# Altium PCB PCB_unpour.PcbDoc
Units mil, origin at the board's own origin, x right, y up, seen from the top; angles counter-clockwise.
Board outline 4325 x 4725 mil, 2 copper layers (Top Layer, Bottom Layer); 101 components, 75 nets, 262 pads, 25 vias.
Unrouted connection lines stored in the file: 28.
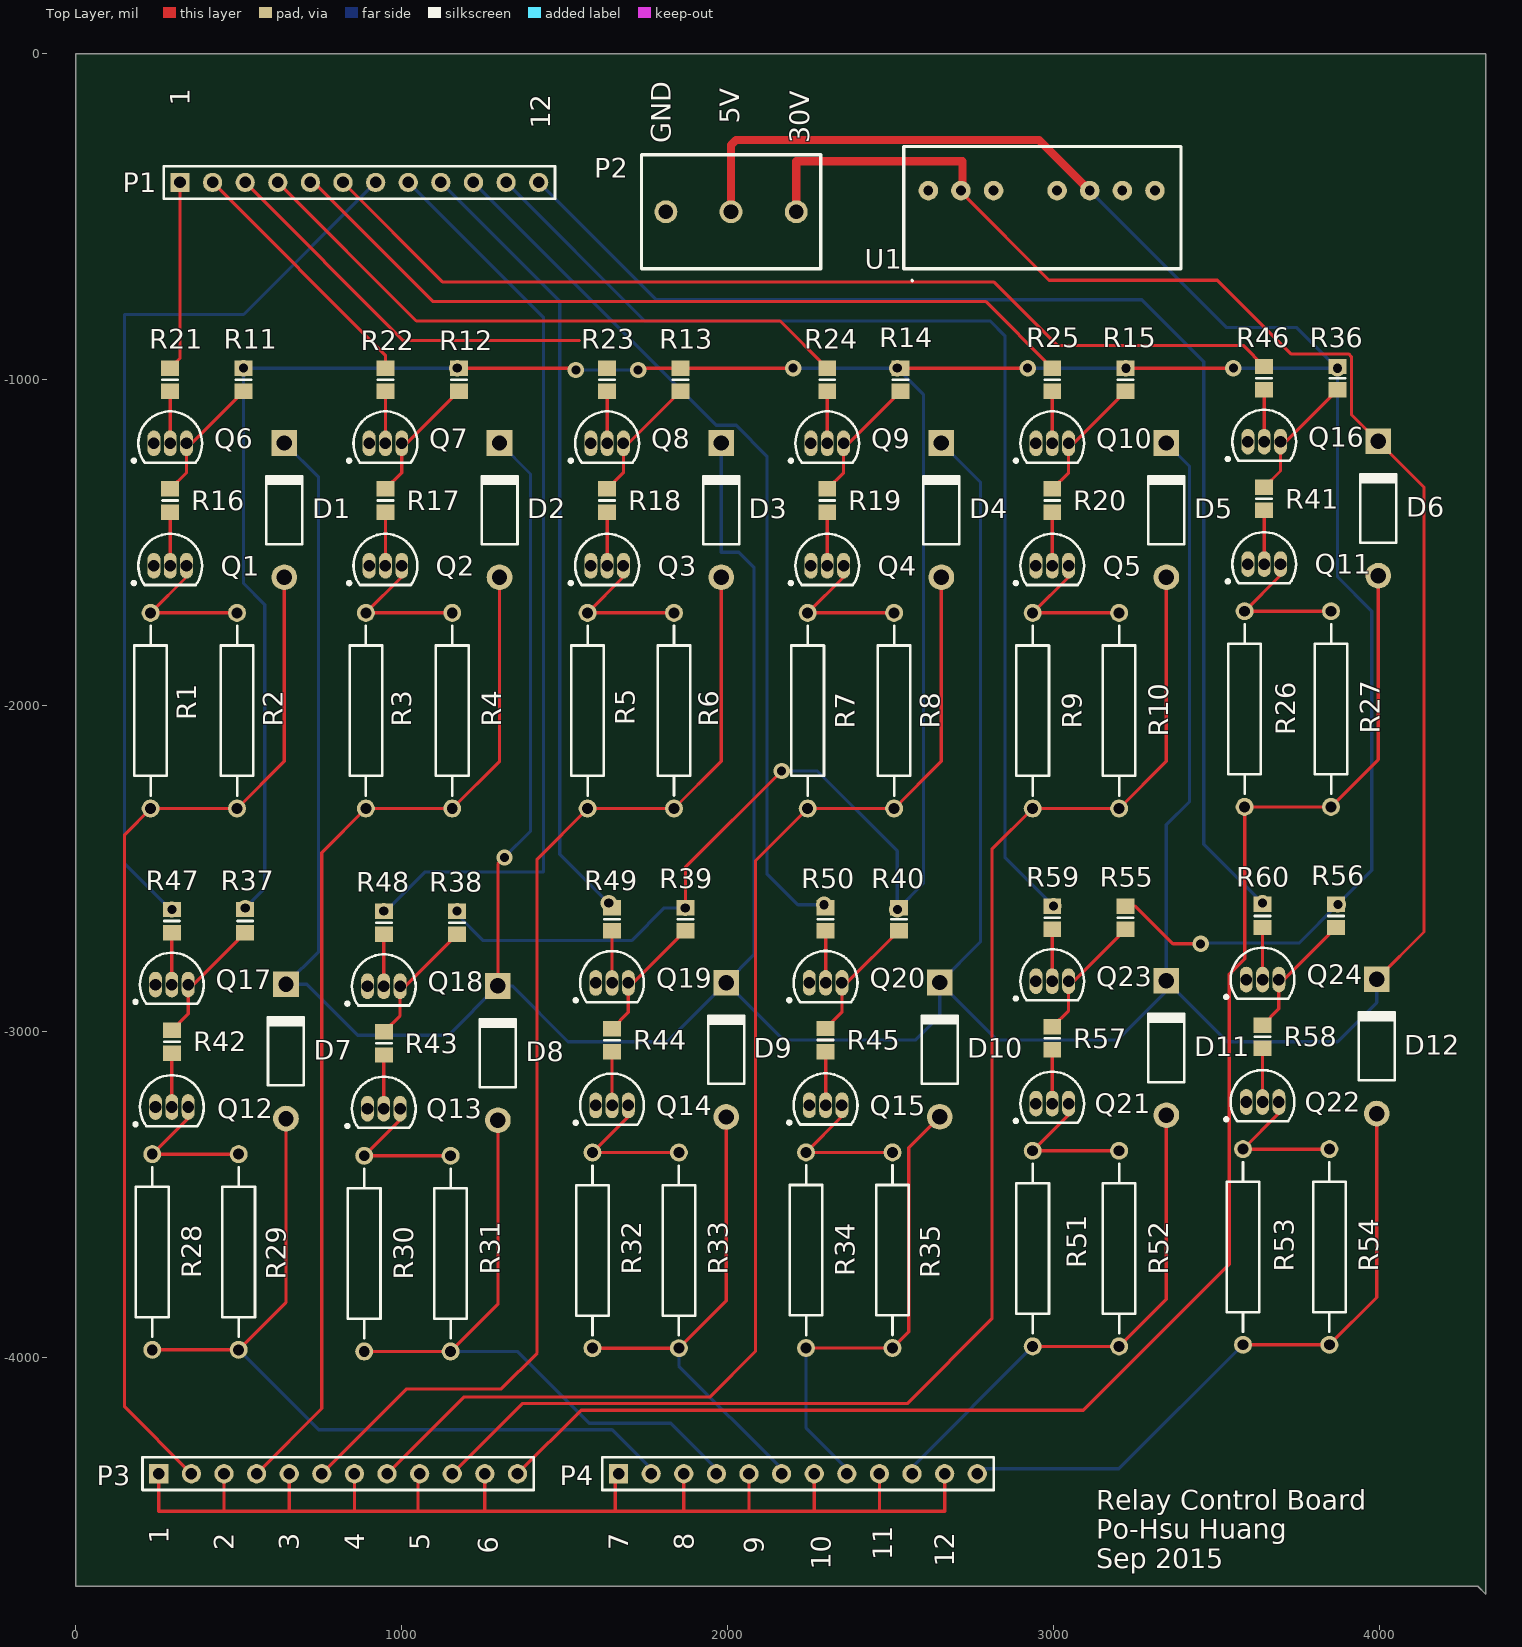
[diagram p0: Top Layer view]
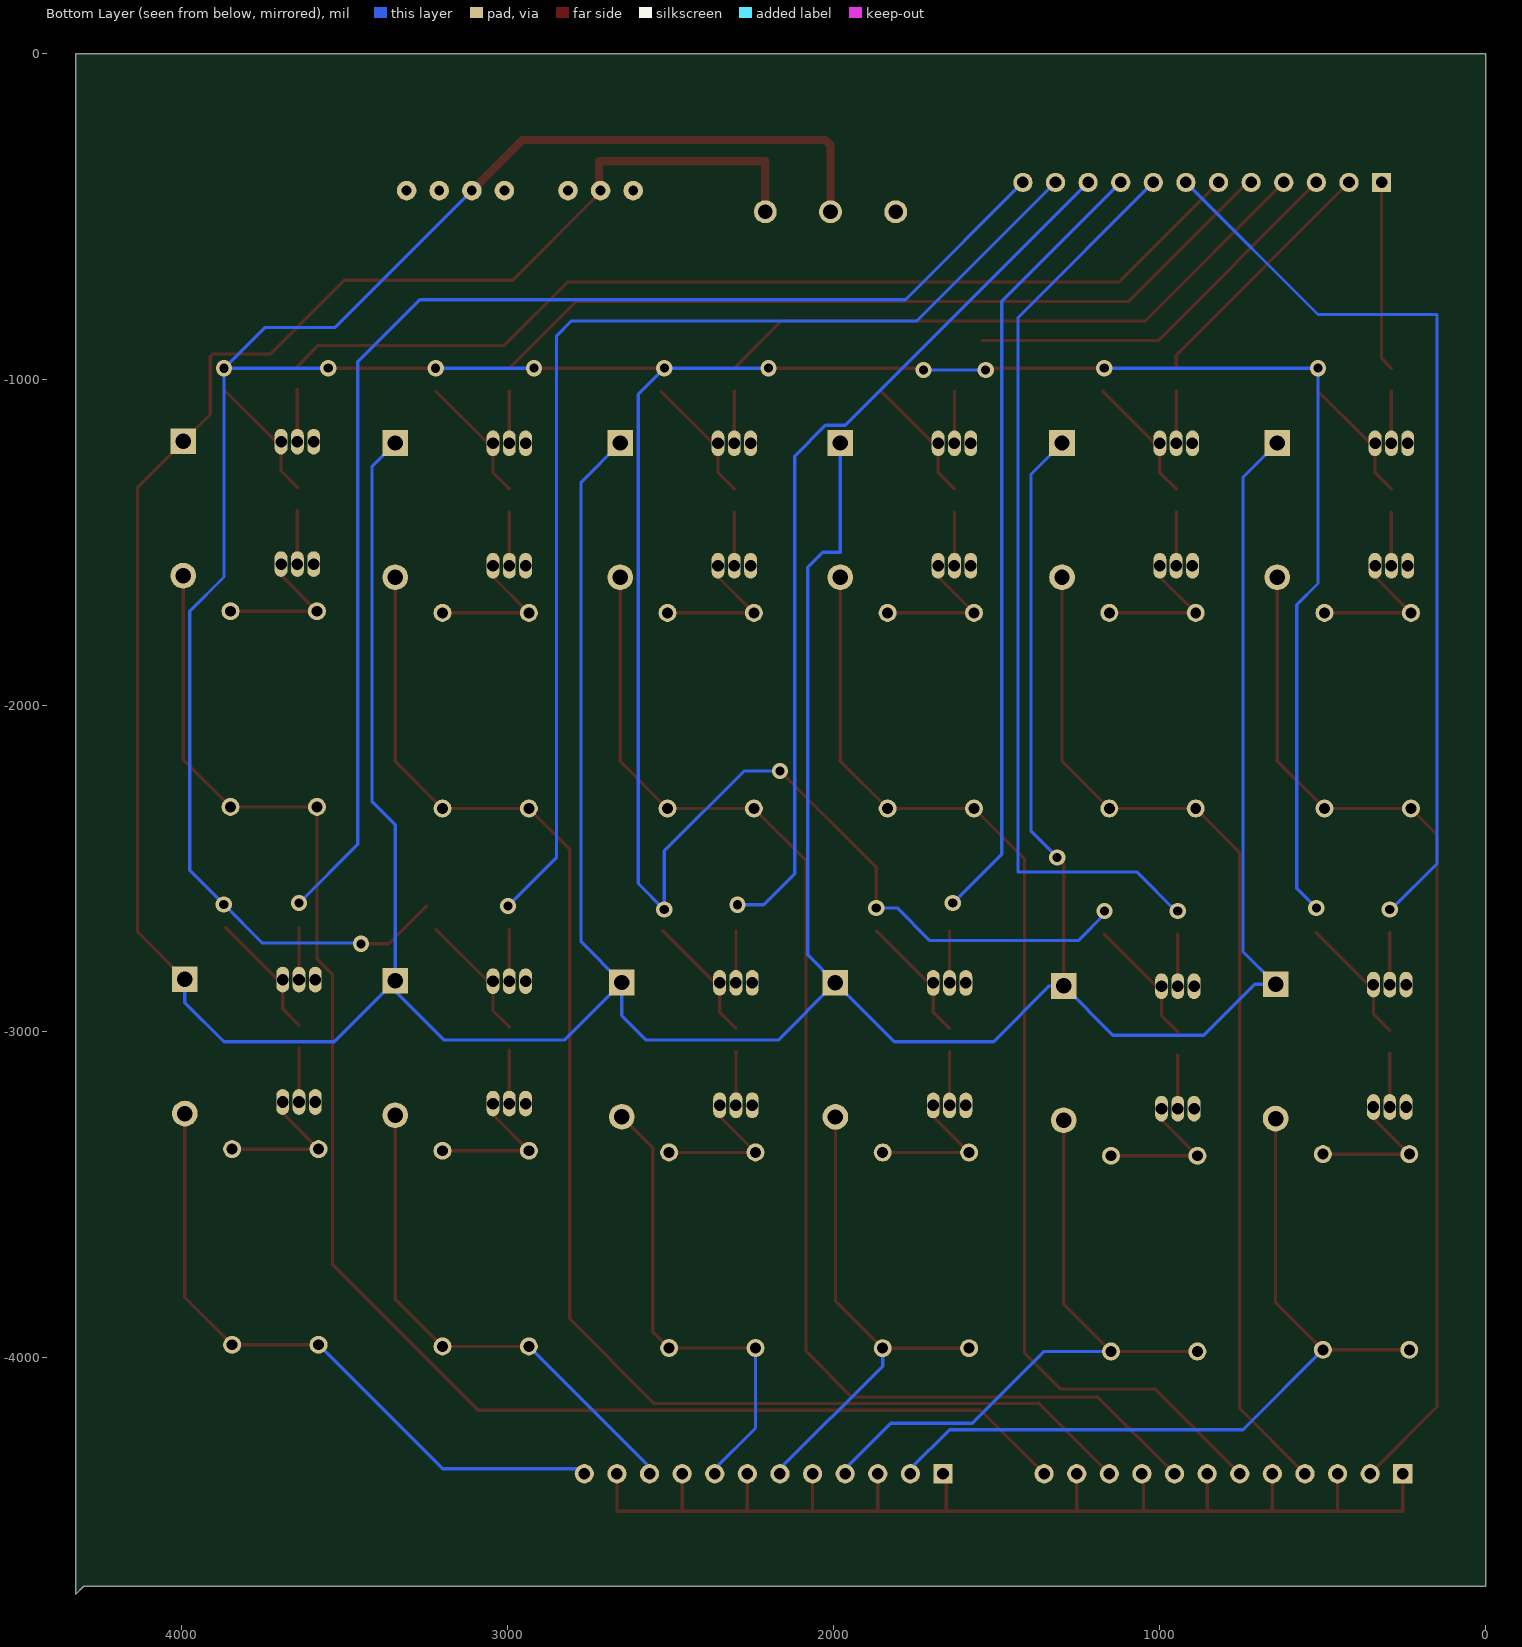
[diagram p1: Bottom Layer view, seen from below]

## Layer stack, top to bottom
Top Solder: solder mask 0.4, Solder Resist, Dk 3.5
Top Layer: signal copper 1.4
Dielectric 1: dielectric 12.6, FR-4, Dk 4.8
Bottom Layer: signal copper 1.4
Bottom Solder: solder mask 0.4, Solder Resist, Dk 3.5

## Board outline
0,0 0,-4700 4300,-4700 4325,-4725 4325,0

## Design rules (kind name [scope] priority, off if disabled: settings)
Clearance [All] p1: gap=10
PolygonConnect [All] p1: connectstyle=Relief reliefconductorwidth=10 reliefentries=4 polygonreliefangle="90 Angle" airgapwidth=10
RoutingVias [All] p1: holewidth=28 width=50 viastyle="Through Hole" minholewidth=28 minwidth=50 maxholewidth=28 maxwidth=50
SolderMaskExpansion [All] p1: expansion=4
Width [All] p1: maxlimit=100 minlimit=10 preferedwidth=10 minimp=50.000000 maximp=50.000000 favimp=50.000000
30 further rules are at their usual default settings.

## Components (designator, comment, footprint, x,y, rotation, side; value= is the part's Value field where it differs from the comment)
D1 "Diode SB140" DO-41 640,-1400 r90 top
D2 "Diode SB140" DO-41 1300,-1400 r90 top
D3 "Diode SB140" DO-41 1980,-1400 r90 top
D4 "Diode SB140" DO-41 2655,-1400 r90 top
D5 "Diode SB140" DO-41 3345,-1400 r90 top
D6 "Diode SB140" DO-41 3995,-1395 r90 top
D7 "Diode SB140" DO-41 645,-3060 r90 top
D8 "Diode SB140" DO-41 1295,-3065 r90 top
D9 "Diode SB140" DO-41 1995,-3055 r90 top
D10 "Diode SB140" DO-41 2650,-3054.57 r90 top
D11 "Diode SB140" DO-41 3345,-3049.57 r90 top
D12 "Diode SB140" DO-41 3990,-3044.57 r90 top
P1 "Header 12" HDR1X12 320,-395 r0 top
P2 "Header 20mils" Header_20mils 2210,-485 r180 top
P3 "Header 12" HDR1X12 255,-4355 r0 top
P4 "Header 12" HDR1X12 1665,-4355 r0 top
Q1 "2N3904" TO-92A 290,-1570.43 r270 top
Q2 "2N3904" TO-92A 950,-1570.43 r270 top
Q3 "2N3904" TO-92A 1630,-1570.43 r270 top
Q4 "2N3904" TO-92A 2305,-1570.43 r270 top
Q5 "2N3904" TO-92A 2995,-1570.43 r270 top
Q6 "2N3904" TO-92A 290,-1195 r270 top
Q7 "2N3904" TO-92A 950,-1195 r270 top
Q8 "2N3904" TO-92A 1630,-1195 r270 top
Q9 "2N3904" TO-92A 2305,-1195 r270 top
Q10 "2N3904" TO-92A 2995,-1195 r270 top
Q11 "2N3904" TO-92A 3645,-1565.43 r270 top
Q12 "2N3904" TO-92A 295,-3230.43 r270 top
Q13 "2N3904" TO-92A 945,-3235.43 r270 top
Q14 "2N3904" TO-92A 1645,-3225.43 r270 top
Q15 "2N3904" TO-92A 2300,-3225 r270 top
Q16 "2N3904" TO-92A 3645,-1190 r270 top
Q17 "2N3904" TO-92A 295,-2855 r270 top
Q18 "2N3904" TO-92A 945,-2860 r270 top
Q19 "2N3904" TO-92A 1645,-2850 r270 top
Q20 "2N3904" TO-92A 2300,-2849.57 r270 top
Q21 "2N3904" TO-92A 2995,-3220 r270 top
Q22 "2N3904" TO-92A 3640,-3215 r270 top
Q23 "2N3904" TO-92A 2995,-2844.57 r270 top
Q24 "2N3904" TO-92A 3640,-2839.57 r270 top
R1 "Res1" AXIAL-0.6 230,-2015 r270 top
R2 "Res1" AXIAL-0.6 495,-2015 r270 top
R3 "Res1" AXIAL-0.6 890,-2015 r270 top
R4 "Res1" AXIAL-0.6 1155,-2015 r270 top
R5 "Res1" AXIAL-0.6 1570,-2015 r270 top
R6 "Res1" AXIAL-0.6 1835,-2015 r270 top
R7 "Res1" AXIAL-0.6 2245,-2015 r270 top
R8 "Res1" AXIAL-0.6 2510,-2015 r270 top
R9 "Res1" AXIAL-0.6 2935,-2015 r270 top
R10 "Res1" AXIAL-0.6 3200,-2015 r270 top
R11 "Res1" 6-0805_N 515,-1000 r90 top
R12 "Res1" 6-0805_N 1175,-1000 r90 top
R13 "Res1" 6-0805_N 1855,-1000 r90 top
R14 "Res1" 6-0805_N 2530,-1000 r90 top
R15 "Res1" 6-0805_N 3220,-1000 r90 top
R16 "Res1" 6-0805_N 290,-1370.43 r90 top
R17 "Res1" 6-0805_N 950,-1370.43 r90 top
R18 "Res1" 6-0805_N 1630,-1370.43 r90 top
R19 "Res1" 6-0805_N 2305,-1370.43 r90 top
R20 "Res1" 6-0805_N 2995,-1370.43 r90 top
R21 "Res1" 6-0805_N 290,-1000 r90 top
R22 "Res1" 6-0805_N 950,-1000 r90 top
R23 "Res1" 6-0805_N 1630,-1000 r90 top
R24 "Res1" 6-0805_N 2305,-1000 r90 top
R25 "Res1" 6-0805_N 2995,-1000 r90 top
R26 "Res1" AXIAL-0.6 3585,-2010 r270 top
R27 "Res1" AXIAL-0.6 3850,-2010 r270 top
R28 "Res1" AXIAL-0.6 235,-3675 r270 top
R29 "Res1" AXIAL-0.6 500,-3675 r270 top
R30 "Res1" AXIAL-0.6 885,-3680 r270 top
R31 "Res1" AXIAL-0.6 1150,-3680 r270 top
R32 "Res1" AXIAL-0.6 1585,-3670 r270 top
R33 "Res1" AXIAL-0.6 1850,-3670 r270 top
R34 "Res1" AXIAL-0.6 2240,-3669.57 r270 top
R35 "Res1" AXIAL-0.6 2505,-3669.57 r270 top
R36 "Res1" 6-0805_N 3870,-995 r90 top
R37 "Res1" 6-0805_N 520,-2660 r90 top
R38 "Res1" 6-0805_N 1170,-2665 r90 top
R39 "Res1" 6-0805_N 1870,-2655 r90 top
R40 "Res1" 6-0805_N 2525,-2654.57 r90 top
R41 "Res1" 6-0805_N 3645,-1365.43 r90 top
R42 "Res1" 6-0805_N 295,-3030.43 r90 top
R43 "Res1" 6-0805_N 945,-3035.43 r90 top
R44 "Res1" 6-0805_N 1645,-3025.43 r90 top
R45 "Res1" 6-0805_N 2300,-3025 r90 top
R46 "Res1" 6-0805_N 3645,-995 r90 top
R47 "Res1" 6-0805_N 295,-2660 r90 top
R48 "Res1" 6-0805_N 945,-2665 r90 top
R49 "Res1" 6-0805_N 1645,-2655 r90 top
R50 "Res1" 6-0805_N 2300,-2654.57 r90 top
R51 "Res1" AXIAL-0.6 2935,-3664.57 r270 top
R52 "Res1" AXIAL-0.6 3200,-3664.57 r270 top
R53 "Res1" AXIAL-0.6 3580,-3659.57 r270 top
R54 "Res1" AXIAL-0.6 3845,-3659.57 r270 top
R55 "Res1" 6-0805_N 3220,-2649.57 r90 top
R56 "Res1" 6-0805_N 3865,-2644.57 r90 top
R57 "Res1" 6-0805_N 2995,-3020 r90 top
R58 "Res1" 6-0805_N 3640,-3015 r90 top
R59 "Res1" 6-0805_N 2995,-2649.57 r90 top
R60 "Res1" 6-0805_N 3640,-2644.57 r90 top
U1 "ITX2405S" ITX2405S 2990,-450 r0 top

## Footprints (in the part's own frame and the unit in brackets; to place one, negate y for a bottom-side part, rotate by r counter-clockwise, add the part's x,y. Pads: shape width x height; smd on the part's side, far side on the other; paste and mask are expansions set on the pad)
6-0805_N [mm] "Chip Resistor, Body 2.0x1.2mm, IPC Medium Density"
  rect 1.2x1.4 smd: 1(-0.9,0) 2(0.9,0)
  silkscreen extent 0,-0.6 0,0.6, body extent -1.07,-0.7 1.07,0.7, height 0.7
AXIAL-0.6 [mm] "Axial Device, Thru-Hole; 2 Leads; 0.6 in Pin Spacing"
  round 1.4 hole 0.85: 1(-7.62,0) 2(7.62,0)
  silkscreen extent -6.6,-1.27 6.6,1.27
DO-41 [mm] "Diode, Axial; Body 5.2 x 2.7 mm (LxDia. max), Lead Dia. 0.86 mm (max)"
  round 2 hole 1.2: 1(-5.23,0)
  rect 2x2 hole 1.2: 2(5.23,0)
  silkscreen extent -2.65,-1.4 2.75,1.4
HDR1X12 [mm] "Connector; Header; 12 Position"
  rect 1.5x1.5 hole 0.9: 1(0,0)
  round 1.5 hole 0.9: 2(2.54,0) 3(5.08,0) 4(7.62,0) 5(10.16,0) 6(12.7,0) 7(15.24,0) 8(17.78,0) 9(20.32,0) 10(22.86,0) 11(25.4,0) 12(27.94,0)
  silkscreen extent -1.27,-1.27 29.21,1.27
Header_20mils [mil]
  round 70 hole 45: 1(0,0) 2(200,0) 3(400,0)
  silkscreen extent -75,-175 475,175
ITX2405S [mil] "ITX2405S"
  round 60 hole 30: 1(-375,30) 2(-275,30) 3(-175,30) 5(20,30) 6(120,30) 7(220,30) 8(320,30)
  silkscreen extent -450,-247 400,165
TO-92A [mm] "TO, Flat Index; 3 In-Line, Axial Leads; Body Dia. 4.5mm; Leads 0.51 x 0.48 mm (max)"
  oval 2x1 hole 0.9: 1(0,-1.27) 2(0,0) 3(0,1.27)
  silkscreen extent -2.48,-2.95 1.5,2.48, body extent -2.5,-2.5 1.5,2.5, height 6.86

## Part data
D1 D2 D3 D4 D5 D6 D7 D8 D9 D10 D11 D12: library part "Diode 1N4006", "1 Amp General Purpose Rectifier"
P1 P3 P4: "Header, 12-Pin"
Q1 Q2 Q3 Q4 Q5 Q6 Q7 Q8 Q9 Q10 Q11 Q12 Q13 Q14 Q15 Q16 Q17 Q18 Q19 Q20 Q21 Q22 Q23 Q24: "NPN General Purpose Amplifier"
R1 R2 R3 R4 R5 R6 R7 R8 R9 R10 R11 R12 R13 R14 R15 R16 R17 R18 R19 R20 R21 R22 R23 R24 R25 R26 R27 R28 R29 R30 R31 R32 R33 R34 R35 R36 R37 R38 R39 R40 R41 R42 R43 R44 R45 R46 R47 R48 R49 R50 R51 R52 R53 R54 R55 R56 R57 R58 R59 R60: "Resistor"

## Via types
v1: diameter 50, hole 28, Top Layer to Bottom Layer, 25 vias

## Nets (pads, with @x,y where several pads share a name; then routed paths per layer and width w, separated by ;. In a path a pad name is that pad's centre, name@x,y a point inside that pad or via, vN(x,y) a via of type N, cw(c..) or ccw(c..) an arc to the next point about the centre after c; other vN are vias at no path point)
5V: P2.2 R11.2 R12.2 R13.2 R14.2 R15.2 R36.2 R37.2 R38.2 R39.2 R40.2 R55.2 R56.2 U1.6 | length 13618.2
  Top Layer w10: v1(1170.43,-964.57) 1539.57,-964.57 v1(1534.13,-970) ; v1(1725,-970) 1730.43,-964.57 R13.2 v1(2200.43,-964.57) ; v1(1869.57,-2620) R39.2 1870,-2495 v1(2165,-2200) ; v1(2519.57,-964.57) R14.2 v1(2919.57,-964.57) ; R15.2@3220.87,-964.57 v1(3550.43,-964.57) ; 3249.13,-2614.13 3365,-2730 v1(3450,-2730)
  Top Layer w25: P2.2 2010,-280 2025,-265 2955,-265 U1.6@3117.5,-427.5
  Bottom Layer w10: v1(520,-2620) 580,-2560 580,-1690 515,-1625 v1(515,-964.57) v1(1170.43,-964.57) ; v1(1170,-2629.57) 1170,-2640 1250,-2720 1705,-2720 1805,-2620 v1(1869.57,-2620) ; v1(1534.13,-970) v1(1725,-970) ; v1(2165,-2200) 2275,-2200 2520,-2445 v1(2520,-2625) 2600,-2545 2600,-1045 v1(2519.57,-964.57) v1(2200.43,-964.57) ; v1(2919.57,-964.57) 3220.43,-964.57 v1(3220.87,-965) ; U1.6@3090,-400 3530,-840 3745,-840 v1@3869.57,-964.57 ; v1(3450,-2730) 3452.5,-2727.5 3752.5,-2727.5 v1(3870.87,-2609.13) 3975,-2505 3975,-1710 3870,-1605 v1(3870,-965) v1@3869.57,-964.57 ; v1(3550.43,-964.57) v1@3869.57,-964.57
30V: D1.2 D2.2 D3.2 D4.2 D5.2 D6.2 D7.2 D8.2 D9.2 D10.2 D11.2 D12.2 P2.1 P3.1 P3.3 P3.5 P3.7 P3.9 P3.11 P4.1 P4.3 P4.5 P4.7 P4.9 P4.11 U1.2 | length 21001
  Top Layer w10: P3.1 255,-4470 455,-4470 ; P3.3 455,-4470 ; P3.5 655,-4470 ; P3.7 855,-4470 ; P3.9@1050,-4360 1050,-4470 ; P3.11 1255,-4470 ; D8.2 1295,-2485 v1(1315,-2465) ; P4.1@1655,-4350 1655,-4470 ; P4.3@1865,-4340 1865,-4465 1870,-4470 ; P4.5@2065,-4340 2065,-4465 2070,-4470 ; P4.7@2265,-4340 2265,-4470 ; P4.9@2465,-4340 2465,-4470 ; P4.11@2665,-4340 2665,-4470 2465,-4470 ; U1.2@2720,-430 2985,-695 3500.91,-695 3726.85,-920.94 3903.77,-920.94 3912.56,-929.73 3912.56,-1106.65 4135,-1329.09 4135,-2693.66 v1(3990,-2838.66) ; 455,-4470 655,-4470 ; 655,-4470 855,-4470 ; 855,-4470 1050,-4470 ; 1050,-4470 1255,-4470 ; 1255,-4470 1655,-4470 ; 1655,-4470 1870,-4470 ; 1870,-4470 2070,-4470 ; 2070,-4470 2265,-4470 ; 2265,-4470 2465,-4470
  Top Layer w25: P2.1 2210,-330 2720,-330 U1.2@2720,-430
  Bottom Layer w10: D1.2 745,-1299.09 745,-2754.09 D7.2 709.09,-2854.09 865,-3010 1144.09,-3010 D8.2 1339.09,-2859.09 1510,-3030 1814.09,-3030 D9.2 ; D2.2 1395,-1289.09 1395,-2385 v1(1315,-2465) ; D3.2 1980,-1529.01 2034.01,-1529.01 2080,-1575 2080,-2764.09 D9.2 ; D4.2 2775,-1314.09 2775,-2723.66 D10.2 ; D5.2 3415.91,-1265 3415.91,-2294.09 3345,-2365 D11.2 ; v1(3990,-2838.66) 3990,-2910 3870,-3030 3531.34,-3030 D11.2 ; D9.2 2170.91,-3025 2575,-3025 2650,-2950 D10.2 ; D10.2 2826.34,-3025 3195,-3025 3345,-2875 D11.2
GND: P2.3 Q1.1 Q2.1 Q3.1 Q4.1 Q5.1 Q6.1 Q7.1 Q8.1 Q9.1 Q10.1 Q11.1 Q12.1 Q13.1 Q14.1 Q15.1 Q16.1 Q17.1 Q18.1 Q19.1 Q20.1 Q21.1 Q22.1 Q23.1 Q24.1 U1.1 U1.7
NetD1_1: D1.1 P3.2 R1.2 R2.2 | length 3192.2
  Top Layer w10: P3.2 150,-4150 150,-2395 R1.2 R2.2 640,-2170 D1.1
NetD2_1: D2.1 P3.4 R3.2 R4.2 | length 3212.9
  Top Layer w10: P3.4 755,-4155 755,-2450 R3.2 R4.2 1300,-2170 D2.1
NetD3_1: D3.1 P3.6 R5.2 R6.2 | length 3581.6
  Top Layer w10: P3.6 1015,-4095 1305,-4095 1415,-3985 1415,-2470 R5.2 R6.2 1980,-2170 D3.1
NetD4_1: D4.1 P3.8 R7.2 R8.2 | length 4050.8
  Top Layer w10: P3.8 1190,-4120 1945,-4120 2085,-3980 2085,-2475 R7.2 R8.2 2655,-2170 D4.1
NetD5_1: D5.1 P3.10 R9.2 R10.2 | length 4502.7
  Top Layer w10: P3.10 1370,-4140 2550,-4140 2810,-3880 2810,-2440 R9.2 R10.2 3345,-2170 D5.1
NetD6_1: D6.1 P3.12 R26.2 R27.2 | length 4905
  Top Layer w10: P3.12 1550,-4160 3090,-4160 3537.44,-3712.56 3537.44,-2823.39 3585,-2775.83 R26.2 R27.2 3995,-2165 D6.1
NetD7_1: D7.1 P4.2 R28.2 R29.2 | length 2450.3
  Top Layer w10: R28.2 R29.2 645,-3830 D7.1
  Bottom Layer w10: R29.2 745,-4220 1645,-4220 P4.2@1765,-4340
NetD8_1: D8.1 P4.4 R30.2 R31.2 | length 1998.3
  Top Layer w10: R30.2 R31.2 1295,-3835 D8.1
  Bottom Layer w10: R31.2 1355,-3980 1575,-4200 1825,-4200 P4.4@1965,-4340
NetD9_1: D9.1 P4.6 R32.2 R33.2 | length 1534.6
  Top Layer w10: R32.2 R33.2 1995,-3825 D9.1
  Bottom Layer w10: R33.2 1850,-4025 P4.6@2165,-4340
NetD10_1: D10.1 P4.8 R34.2 R35.2 | length 1456.4
  Top Layer w10: R34.2 R35.2 2555,-3919.57 2555,-3355.47 D10.1
  Bottom Layer w10: R34.2 2240,-4215 P4.8@2365,-4340
NetD11_1: D11.1 P4.10 R51.2 R52.2 | length 1562.8
  Top Layer w10: R51.2 R52.2 3345,-3819.57 D11.1
  Bottom Layer w10: P4.10 P4.10@2565,-4349.57 ; P4.10@2565,-4334.57 R51.2
NetD12_1: D12.1 P4.12 R53.2 R54.2 | length 2006.7
  Top Layer w10: R53.2 R54.2 3990,-3814.57 D12.1
  Bottom Layer w10: P4.12@2765,-4340 3199.57,-4340 R53.2
NetP1_1: P1.1 R21.2 | length 582
  Top Layer w10: R21.2 320,-934.57 P1.1
NetP1_2: P1.2 R22.2 | length 789.1
  Top Layer w10: P1.2 950,-925 R22.2
NetP1_3: P1.3 R23.2 | length 1226.3
  Top Layer w10: P1.3 1005,-880 1545.43,-880
NetP1_4: P1.4 R24.2 | length 1920.9
  Top Layer w10: P1.4 1045,-820 2160.43,-820 R24.2
NetP1_5: P1.5 R25.2 | length 2510.9
  Top Layer w10: P1.5 730,-395 1095,-760 2790.43,-760 R25.2
NetP1_6: P1.6 R46.2 | length 3058.9
  Top Layer w10: P1.6 1125,-700 2815,-700 3010,-895 3580.43,-895 R46.2
NetP1_7: P1.7 R47.2 | length 2830.1
  Top Layer w10: P1.7@920,-400 P1.7
  Bottom Layer w10: v1(295,-2624.57) 290.43,-2624.57 150,-2484.13 150,-800 515,-800 P1.7
NetP1_8: P1.8 R48.2 | length 2826.4
  Bottom Layer w10: v1(945,-2629.57) 950.43,-2629.57 1070,-2510 1435,-2510 1435,-810 P1.8
NetP1_9: P1.9 R49.2 | length 2423.3
  Bottom Layer w10: P1.9 1485,-760 1485,-2455 v1(1635,-2605)
NetP1_10: P1.10 R50.2 | length 2742.8
  Bottom Layer w10: P1.10 1964.72,-1139.72 2025.58,-1139.72 2120,-1234.14 2120,-2515 2215,-2610 v1(2295,-2610)
NetP1_11: P1.11 R59.2 | length 3540.6
  Top Layer w10: P1.11@1315,-395 P1.11
  Bottom Layer w10: P1.11 1745,-820 2805,-820 2850,-865 2850,-2465 v1(2999.13,-2614.13)
NetP1_12: P1.12 R60.2 | length 4002.4
  Bottom Layer w10: P1.12 1780,-755 3270,-755 3460,-945 3460,-2425 v1(3640,-2605)
NetQ1_2: Q1.2 R16.1 | length 164.6
  Top Layer w10: Q1.2 R16.1
NetQ1_3: Q1.3 R1.1 R2.1 | length 455.1
  Top Layer w10: Q1.3 340,-1605 R1.1 R2.1
NetQ2_2: Q2.2 R17.1 | length 164.6
  Top Layer w10: Q2.2 R17.1
NetQ2_3: Q2.3 R3.1 R4.1 | length 455.1
  Top Layer w10: Q2.3 1000,-1605 R3.1 R4.1
NetQ3_2: Q3.2 R18.1 | length 164.6
  Top Layer w10: Q3.2 R18.1
NetQ3_3: Q3.3 R5.1 R6.1 | length 455.1
  Top Layer w10: Q3.3 1680,-1605 R5.1 R6.1
NetQ4_2: Q4.2 R19.1 | length 164.6
  Top Layer w10: Q4.2 R19.1
NetQ4_3: Q4.3 R7.1 R8.1 | length 455.1
  Top Layer w10: Q4.3 2355,-1605 R7.1 R8.1
NetQ5_2: Q5.2 R20.1 | length 164.6
  Top Layer w10: Q5.2 R20.1
NetQ5_3: Q5.3 R9.1 R10.1 | length 455.1
  Top Layer w10: Q5.3 3045,-1605 R9.1 R10.1
NetQ6_2: Q6.2 R21.1 | length 159.6
  Top Layer w10: Q6.2 R21.1
NetQ6_3: Q6.3 R11.1 R16.2 | length 386.4
  Top Layer w10: R16.2 340,-1285 Q6.3 ; Q6.3@355.43,-1195 R11.1
NetQ7_2: Q7.2 R22.1 | length 159.6
  Top Layer w10: Q7.2 R22.1
NetQ7_3: Q7.3 R12.1 R17.2 | length 386.4
  Top Layer w10: R17.2 1000,-1285 Q7.3 ; Q7.3@1015.43,-1195 R12.1
NetQ8_2: Q8.2 R23.1 | length 159.6
  Top Layer w10: Q8.2 R23.1
NetQ8_3: Q8.3 R13.1 R18.2 | length 386.4
  Top Layer w10: R18.2 1680,-1285 Q8.3 ; Q8.3@1695.43,-1195 R13.1
NetQ9_2: Q9.2 R24.1 | length 159.6
  Top Layer w10: Q9.2 R24.1
NetQ9_3: Q9.3 R14.1 R19.2 | length 386.4
  Top Layer w10: R19.2 2355,-1285 Q9.3 ; Q9.3@2370.43,-1195 R14.1
NetQ10_2: Q10.2 R25.1 | length 159.6
  Top Layer w10: Q10.2 R25.1
NetQ10_3: Q10.3 R15.1 R20.2 | length 386.4
  Top Layer w10: R20.2 3045,-1285 Q10.3 ; Q10.3@3060.43,-1195 R15.1
NetQ11_2: Q11.2 R41.1 | length 164.6
  Top Layer w10: Q11.2 R41.1
NetQ11_3: Q11.3 R26.1 R27.1 | length 455.1
  Top Layer w10: Q11.3 3695,-1600 R26.1 R27.1
NetQ12_2: Q12.2 R42.1 | length 164.6
  Top Layer w10: Q12.2 R42.1
NetQ12_3: Q12.3 R28.1 R29.1 | length 455.1
  Top Layer w10: Q12.3 345,-3265 R28.1 R29.1
NetQ13_2: Q13.2 R43.1 | length 164.6
  Top Layer w10: Q13.2 R43.1
NetQ13_3: Q13.3 R30.1 R31.1 | length 455.1
  Top Layer w10: Q13.3 995,-3270 R30.1 R31.1
NetQ14_2: Q14.2 R44.1 | length 164.6
  Top Layer w10: Q14.2 R44.1
NetQ14_3: Q14.3 R32.1 R33.1 | length 455.1
  Top Layer w10: Q14.3 1695,-3260 R32.1 R33.1
NetQ15_2: Q15.2 R45.1 | length 164.6
  Top Layer w10: Q15.2 R45.1
NetQ15_3: Q15.3 R34.1 R35.1 | length 455.1
  Top Layer w10: Q15.3 2350,-3259.57 R34.1 R35.1
NetQ16_2: Q16.2 R46.1 | length 159.6
  Top Layer w10: Q16.2 R46.1
NetQ16_3: Q16.3 R36.1 R41.2 | length 386.4
  Top Layer w10: R41.2 3695,-1280 Q16.3 ; Q16.3@3710.43,-1190 R36.1
NetQ17_2: Q17.2 R47.1 | length 159.6
  Top Layer w10: Q17.2 R47.1
NetQ17_3: Q17.3 R37.1 R42.2 | length 386.4
  Top Layer w10: R42.2 345,-2945 Q17.3 ; Q17.3@360.43,-2855 R37.1
NetQ18_2: Q18.2 R48.1 | length 159.6
  Top Layer w10: Q18.2 R48.1
NetQ18_3: Q18.3 R38.1 R43.2 | length 386.4
  Top Layer w10: R43.2 995,-2950 Q18.3 ; Q18.3@1010.43,-2860 R38.1
NetQ19_2: Q19.2 R49.1 | length 159.6
  Top Layer w10: Q19.2 R49.1
NetQ19_3: Q19.3 R39.1 R44.2 | length 386.4
  Top Layer w10: R44.2 1695,-2940 Q19.3 ; Q19.3@1710.43,-2850 R39.1
NetQ20_2: Q20.2 R50.1 | length 159.6
  Top Layer w10: Q20.2 R50.1
NetQ20_3: Q20.3 R40.1 R45.2 | length 386.4
  Top Layer w10: R45.2 2350,-2939.57 Q20.3 ; Q20.3@2365.43,-2849.57 R40.1
NetQ21_2: Q21.2 R57.1 | length 164.6
  Top Layer w10: Q21.2 R57.1
NetQ21_3: Q21.3 R51.1 R52.1 | length 455.1
  Top Layer w10: Q21.3 3045,-3254.57 R51.1 R52.1
NetQ22_2: Q22.2 R58.1 | length 164.6
  Top Layer w10: Q22.2 R58.1
NetQ22_3: Q22.3 R53.1 R54.1 | length 455.1
  Top Layer w10: Q22.3 3690,-3249.57 R53.1 R54.1
NetQ23_2: Q23.2 R59.1 | length 159.6
  Top Layer w10: Q23.2 R59.1
NetQ23_3: Q23.3 R55.1 R57.2 | length 386.4
  Top Layer w10: R57.2 3045,-2934.57 Q23.3 ; Q23.3@3060.43,-2844.57 R55.1
NetQ24_2: Q24.2 R60.1 | length 159.6
  Top Layer w10: Q24.2 R60.1
NetQ24_3: Q24.3 R56.1 R58.2 | length 386.4
  Top Layer w10: R58.2 3690,-2929.57 Q24.3 ; Q24.3@3705.43,-2839.57 R56.1
pads on no net: U1.3 U1.5 U1.8

## Other copper
Bottom Layer:

## Silkscreen, mask and mechanical layers (free items; w line width, h text height)
Top Overlay:
  text "1" at 350,-160.05 h60 r90
  text "5V" at 2035,-215.02 h60 r90
  text "12" at 1455,-230.02 h60 r90
  text "GND" at 1825,-275 h60 r90
  text "30V" at 2250,-275 h60 r90
  text "1" at 285,-4570.05 h60 r90
  text "2" at 485,-4590.04 h60 r90
  text "3" at 685,-4590.04 h60 r90
  text "4" at 885,-4590 h60 r90
  text "5" at 1085,-4590 h60 r90
  text "7" at 1695,-4590.04 h60 r90
  text "8" at 1895,-4590.04 h60 r90
  text "6" at 1295,-4600.04 h60 r90
  text "9" at 2110,-4600 h60 r90
  text "11" at 2505,-4620.03 h60 r90
  text "12" at 2695,-4640 h60 r90
  text "Relay Control Board / Po-Hsu Huang / Sep 2015" at 3130,-4645 h60
  text "10" at 2315,-4650 h60 r90